# Altium PCB PCB_Olymp_ReflowOven_CANNode_STM32.PcbDoc
Units mm, origin at the board's own origin, x right, y up, seen from the top; angles counter-clockwise.
Board outline 59.94 x 59.94 mm, 2 copper layers (Top Layer, Bottom Layer); 38 components, 51 nets, 172 pads, 6 vias.
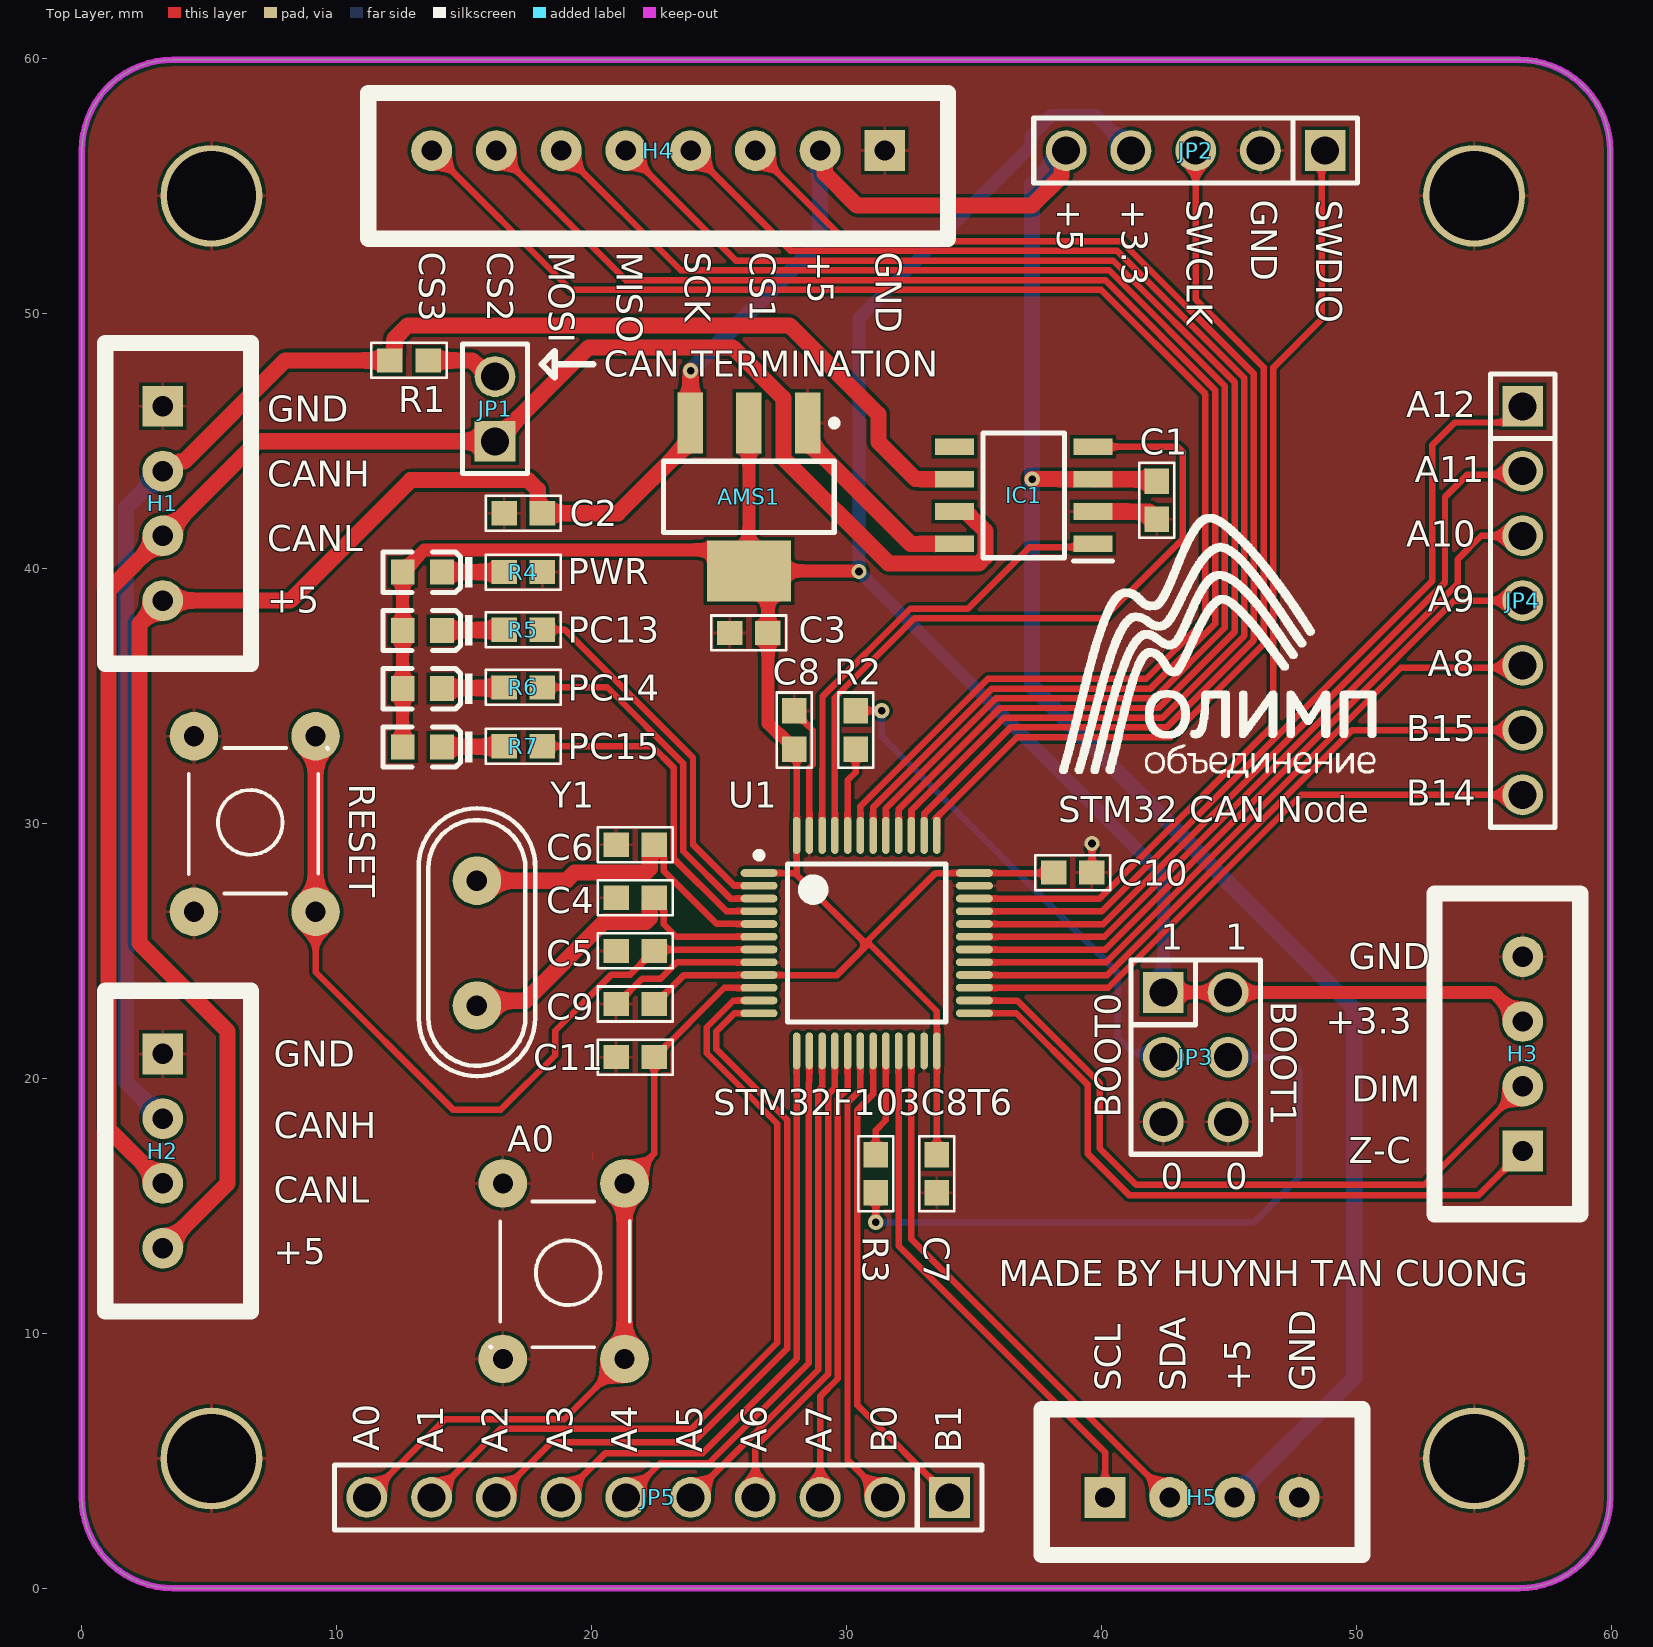
[diagram p0: Top Layer view]
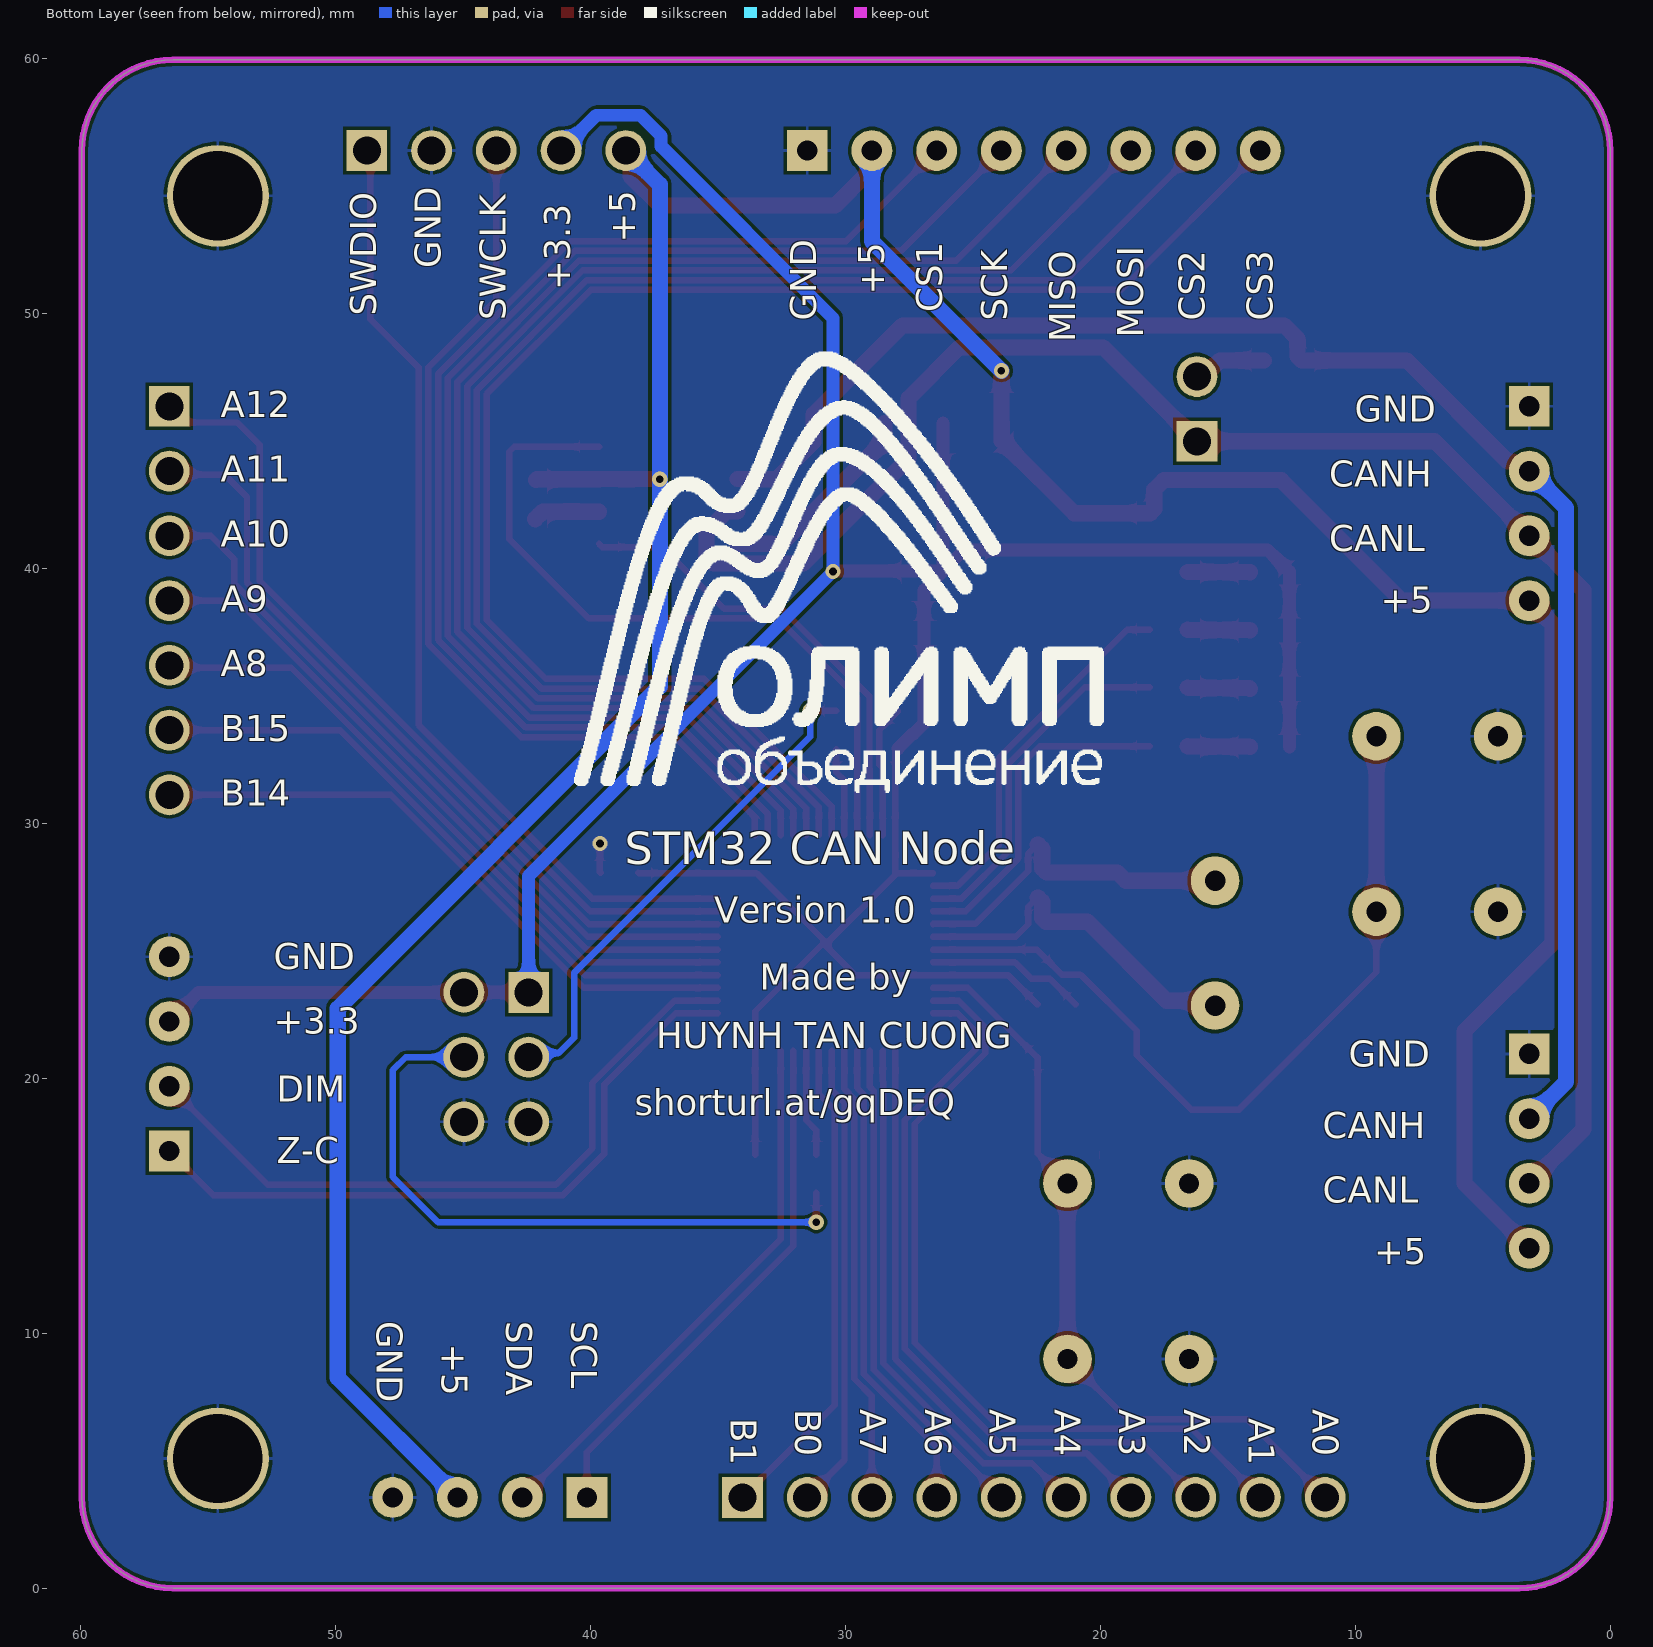
[diagram p1: Bottom Layer view, seen from below]
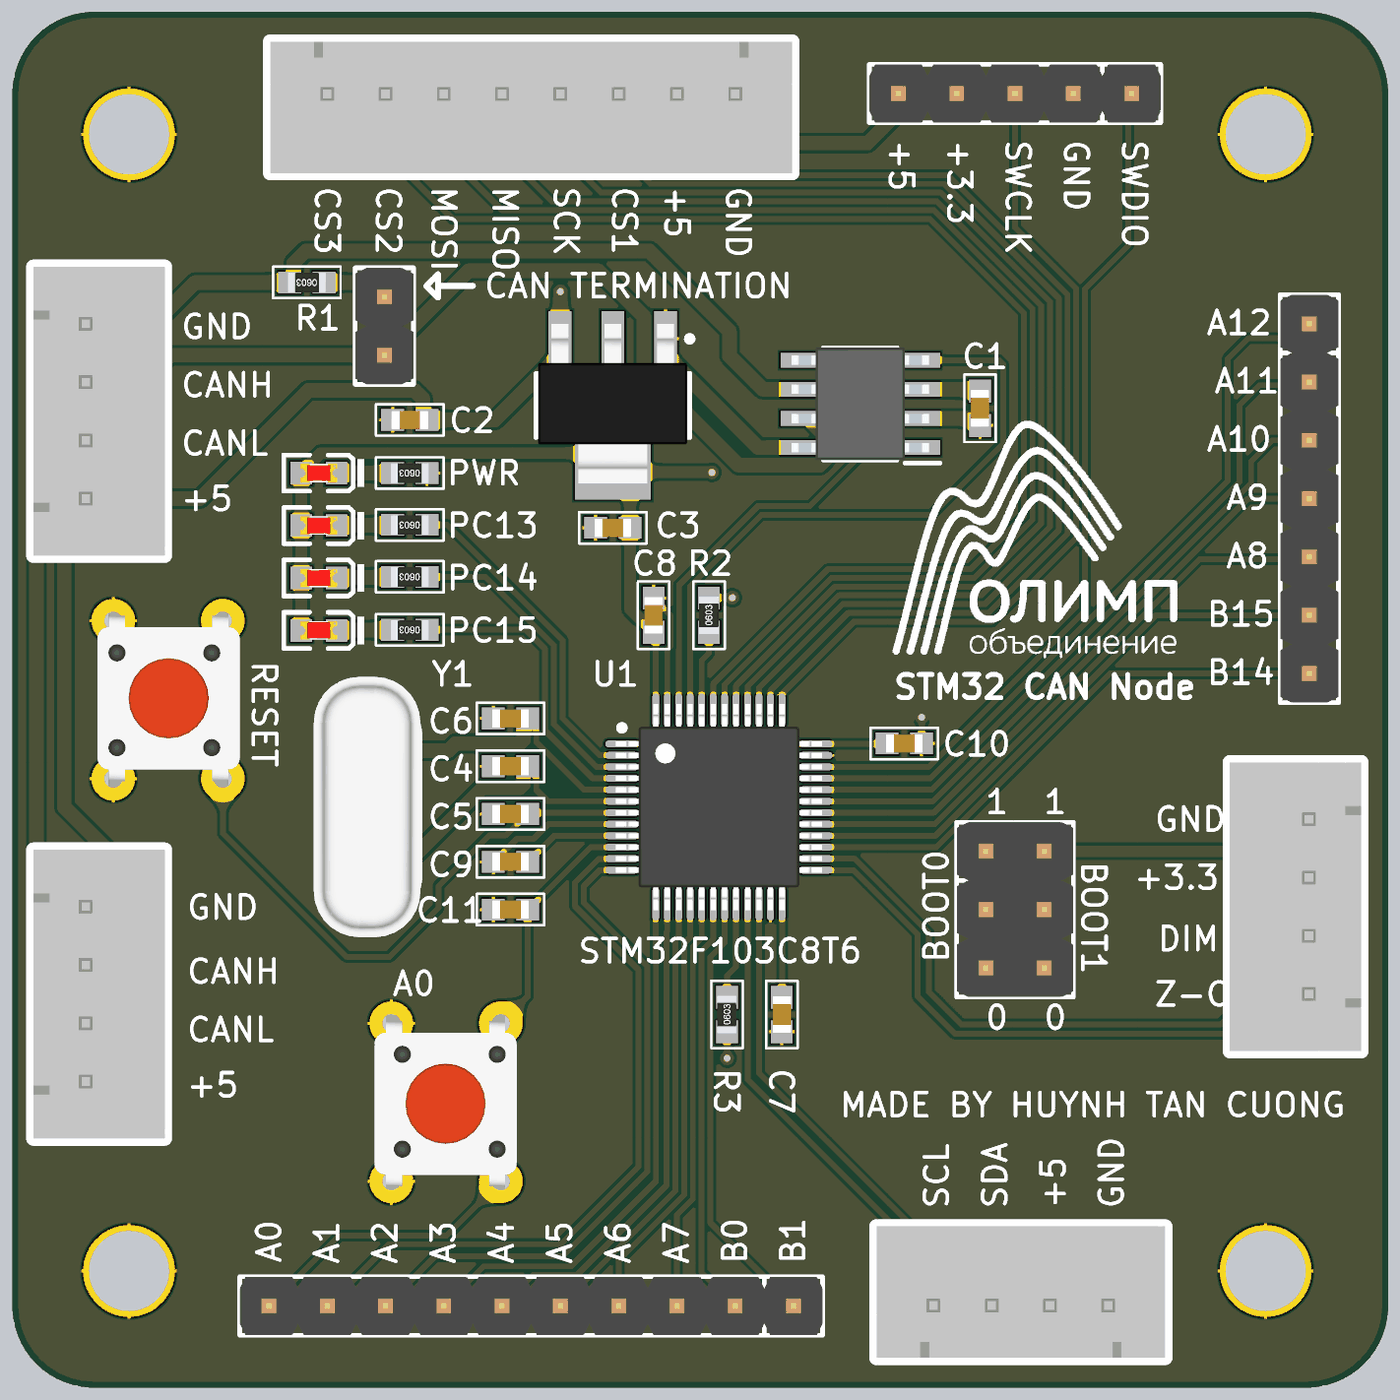
[diagram p2: 3D render of the assembled board from above, using the file's embedded part models]

## Layer stack, top to bottom
Top Solder: solder mask 0.0102, Solder Resist, Dk 3.5
Top Layer: signal copper 0.0356
Dielectric 1: dielectric 0.32, FR-4, Dk 4.8
Bottom Layer: signal copper 0.0356
Bottom Solder: solder mask 0.0102, Solder Resist, Dk 3.5

## Board outline
3.556,0 cw(c3.556,3.556) 0,3.556 0,56.388 cw(c3.556,56.388) 3.556,59.944 56.388,59.944 cw(c56.388,56.388) 59.944,56.388 59.944,3.556 cw(c56.388,3.556) 56.388,0

## Design rules (kind name [scope] priority, off if disabled: settings)
BoardOutlineClearance [All] p1: gap=0.2 ignorepadtopadclearanceinfootprint=FALSE
Clearance [All] p1: gap=0.127 ignorepadtopadclearanceinfootprint=TRUE except(0.2: Arc-THPad Track-THPad; 0.25: Arc-Hole Track-Hole SMDPad-Hole THPad-Hole Via-Hole Fill-Hole Poly-Hole Region-Hole Text-Hole; 0.254: Arc-Via Track-Via Via-Via; 0.5: THPad-THPad)
ComponentClearance [All] p1: gap=0.127 collisioncheckmode=3 verticalgap=0.127 showdistances=TRUE
DiffPairsRouting [All] p1: maxlimit=0.254 minlimit=0.127 mostfreqgap=0.127 toplayer_minwidth=0.127 toplayer_maxwidth=25.4 toplayer_prefwidth=0.127 bottomlayer_minwidth=0.127 bottomlayer_maxwidth=25.4 bottomlayer_prefwidth=0.127 maxuncoupledlength=12.7
Height [All] p1: minheight=0 maxheight=1816.048 prefheight=12.7
HoleSize HoleSize_Via [IsVia] p1: absolutevalues=TRUE maxlimit=99 minlimit=0.2 maxpercent=80.000 minpercent=20.000
HoleSize [All] p2: absolutevalues=TRUE maxlimit=6.3 minlimit=0.2 maxpercent=80.000 minpercent=20.000
HoleSize HoleSize_Pad [IsPad] p3: absolutevalues=TRUE maxlimit=6.35 minlimit=0.7 maxpercent=80.000 minpercent=20.000
HoleToHoleClearance [All] p1: gap=0.25 allowstackedmicrovias=FALSE
MinimumAnnularRing [All] p1: minimumring=0.076
MinimumSolderMaskSliver [All] p1: minsoldermaskwidth=0
PlaneClearance [All] p1: clearance=0.127
PlaneConnect PlaneConnectPowerPads [InPadClass('PowerPads')] p1: planeconnectstyle=Direct reliefexpansion=0.508 reliefentries=4 reliefconductorwidth=0.254 reliefairgap=0.254
PlaneConnect [All] p2: pad.planeconnectstyle=Relief pad.reliefexpansion=0.3 pad.reliefentries=4 pad.reliefconductorwidth=0.127 pad.reliefairgap=0.127 via.planeconnectstyle=Direct via.reliefexpansion=0.3 via.reliefentries=4 via.reliefconductorwidth=0.127 via.reliefairgap=0.127
PolygonConnect PolygonConnectPowerPads [All vs (InPadClass('PowerPads'))] p1: connectstyle=Direct reliefconductorwidth=0.254 reliefentries=4 polygonreliefangle="90 Angle" airgapwidth=0.254
PolygonConnect [All] p2: thpad.connectstyle=Relief thpad.reliefconductorwidth=0.127 thpad.reliefentries=4 thpad.polygonreliefangle="90 Angle" thpad.airgapwidth=0.127 smdpad.connectstyle=Relief smdpad.reliefconductorwidth=0.127 smdpad.reliefentries=4 smdpad.polygonreliefangle="90 Angle" smdpad.airgapwidth=0.127 via.connectstyle=Direct via.reliefconductorwidth=0.127 via.reliefentries=4 via.polygonreliefangle="90 Angle" via.airgapwidth=0.127
RoutingVias [All] p1: holewidth=0.3 width=0.6 viastyle="Through Hole" minholewidth=0.2 minwidth=0.4 maxholewidth=0.6 maxwidth=6.6
SilkToSilkClearance [All] p1: silktosilkclearance=0
SilkToSolderMaskClearance [IsPad] p1: minsilkscreentomaskgap=0.127 clearancetoexposedcopper=TRUE
SolderMaskExpansion [All] p1: expansion=0.075 istentingtop=FALSE
Width Width_2 [InNet('+3.3')] p1: maxlimit=0.508 minlimit=0.152 preferedwidth=0.203
Width [All] p2: maxlimit=25.4 minlimit=0.127 preferedwidth=0.127 minimp=50.000000 maximp=50.000000 favimp=50.000000
Width Width_1 [All] p3: maxlimit=0.635 minlimit=0.152 preferedwidth=0.254
20 further rules are at their usual default settings.

## Classes and differential pairs
component class SCH_POWER_5V_to_3.3V: AMS1 C2 C3
component class STM32F103xx_LQFP48: A0 C4 C5 C6 C7 C8 C9 C10 C11 H3 H4 H5 I2c JP2 JP3 JP4 JP5 ON PC13 PC14 PC15 POW R2 R3 R4 R5 R6 R7 RESET U1 Y1
component class SCH_CAN_Transceiver_TJA1050: C1 H1 H2 IC1 JP1 R1

## Components (designator, comment, footprint, x,y, rotation, side; value= is the part's Value field where it differs from the comment)
A0 "Nut Nhan 4 Chan Cam 6x6" "Nut Nhan 4 Chan Cam 6x6" 21.488,15.545 r270 top (schematic designator PA0)
AMS1 "AMS1117-3.3V" SOT223 26.162,42.799 r180 top value="AMS1117-3.3V SOT223"
C1 "104" "tu 0603" 42.164,42.672 r270 top
C2 "104" "tu 0603" 17.316,42.164 r0 top
C3 "104" "tu 0603" 26.162,37.465 r0 top
C4 "20pF" "tu 0603" 21.705,27.076 r180 top
C5 "104" "tu 0603" 21.705,24.994 r180 top
C6 "20pF" "tu 0603" 21.705,29.159 r180 top
C7 "104" "tu 0603" 33.528,16.256 r270 top
C8 "104" "tu 0603" 27.94,33.655 r90 top
C9 "104" "tu 0603" 21.705,22.911 r180 top
C10 "104" "tu 0603" 38.862,28.067 r0 top
C11 "104" "tu 0603" 21.705,20.828 r180 top
H1 "Header 4P 2.54 Duc Thang" XH2.54M-4 3.175,46.355 r270 top
H2 "Header 4P 2.54 Duc Thang" XH2.54M-4 3.175,20.955 r270 top
H3 "TRIAC" XH2.54M-4 56.515,17.145 r90 top
H4 "Header 8P 2.54 Duc Thang" XH2.54M-8 31.496,56.388 r180 top
H5 "Header 4P 2.54 Duc Thang" XH2.54M-4 40.132,3.556 r0 top
IC1 "TJA1050T" SOIC127P600X175-8N 36.945,42.864 r180 top
JP1 "JP 1x2 2.54" "JP 1x2 DT" 16.205,44.983 r90 top
JP2 "JP 1x5 2.54" "JP 1x5 DT" 48.768,56.388 r180 top
JP3 "JP 2x3 2.54" "JP 2x3 DT" 43.688,20.828 r270 top
JP4 "JP 1x7 2.54" "JP 1x7 DT" 56.515,46.355 r270 top
JP5 "JP 1x10 2.54" "JP 1x10 DT" 34.036,3.556 r180 top
PC13 "0603 Green" 0603_LED_S1 13.354,37.564 r180 top
PC14 "0603 Green" 0603_LED_S1 13.354,35.278 r180 top
PC15 "0603 Green" 0603_LED_S1 13.354,32.992 r180 top
PWR "0603 Red" 0603_LED_S1 13.354,39.85 r180 top
R1 "120R" "tro smd 0603" 12.831,48.157 r180 top
R2 "100k" "tro smd 0603" 30.353,33.655 r90 top
R3 "100k" "tro smd 0603" 31.14,16.256 r90 top
R4 "510R" "tro smd 0603" 17.316,39.853 r180 top
R5 "510R" "tro smd 0603" 17.316,37.592 r180 top
R6 "510R" "tro smd 0603" 17.316,35.331 r180 top
R7 "510R" "tro smd 0603" 17.316,33.02 r180 top
RESET "Nut Nhan 4 Chan Cam 6x6" "Nut Nhan 4 Chan Cam 6x6" 4.191,26.86 r90 top
U1 "STM32F103C8T6" STM32_LQPF48 30.785,25.298 r0 top
Y1 "8Mhz" "Thach Anh 2 chan cam" 15.494,25.298 r270 top value=4Mhz

## Footprints (in the part's own frame and the unit in brackets; to place one, negate y for a bottom-side part, rotate by r counter-clockwise, add the part's x,y. Pads: shape width x height; smd on the part's side, far side on the other; paste and mask are expansions set on the pad)
0603_LED_S1 [mm]
  rect 0.93x0.98 smd: A(0.77,0) K(-0.77,0)
  silkscreen extent -1.97,-0.79 1.54,0.79, body extent -0.8,-0.4 0.8,0.4, height 0.6
"JP 1x2 DT" [mm] "2 pins, 1 row, straight, gold plating"
  rect 1.6x1.6 hole 1.1: 1(0,0)
  round 1.6 hole 1.1: 2(2.54,0)
  silkscreen extent -1.27,-1.27 3.81,1.27, body extent -1.27,-1.27 3.81,1.27, height 8.54
"JP 1x5 DT" [mm] "5 pins, 1 row, straight, gold plating"
  rect 1.6x1.6 hole 1.1: 1(0,0)
  round 1.6 hole 1.1: 2(2.54,0) 3(5.08,0) 4(7.62,0) 5(10.16,0)
  silkscreen extent -1.27,-1.27 11.43,1.27, body extent -1.27,-1.27 11.43,1.27, height 8.54
"JP 1x7 DT" [mm] "7 pins, 1 row, straight, gold plating"
  rect 1.6x1.6 hole 1.1: 1(0,0)
  round 1.6 hole 1.1: 2(2.54,0) 3(5.08,0) 4(7.62,0) 5(10.16,0) 6(12.7,0) 7(15.24,0)
  silkscreen extent -1.27,-1.27 16.51,1.27, body extent -1.27,-1.27 16.51,1.27, height 8.54
"JP 1x10 DT" [mm] "10 pins, 1 row, straight, gold plating"
  rect 1.6x1.6 hole 1.1: 1(0,0)
  round 1.6 hole 1.1: 2(2.54,0) 3(5.08,0) 4(7.62,0) 5(10.16,0) 6(12.7,0) 7(15.24,0) 8(17.78,0) 9(20.32,0) 10(22.86,0)
  silkscreen extent -1.27,-1.27 24.13,1.27, body extent -1.27,-1.27 24.13,1.27, height 8.54
"JP 2x3 DT" [mm]
  rect 1.6x1.6 hole 1.1: 1(-2.54,-1.27)
  round 1.6 hole 1.1: 2(0,-1.27) 3(2.54,-1.27) 4(2.54,1.27) 5(0,1.27) 6(-2.54,1.27)
  silkscreen extent -3.81,-2.54 3.81,2.54, body extent -3.81,-2.54 3.81,2.54, height 8.55
"Nut Nhan 4 Chan Cam 6x6" [mil] "SW button 4pin, 250 x250 mil"
  round 75 hole 31: 1(-13,-8) 1(258,-8) 2(-13,-196) 2(258,-196)
  silkscreen extent 15,-215 240,0, body extent -31,-225 281,19, height 276
SOIC127P600X175-8N [mm]
  rect 1.525x0.65 smd: 1(-2.712,1.905) 2(-2.712,0.635) 3(-2.712,-0.635) 4(-2.712,-1.905) 5(2.712,-1.905) 6(2.712,-0.635) 7(2.712,0.635) 8(2.712,1.905)
  silkscreen extent -3.47,-2.45 1.6,2.58, body extent -3,-2.45 3,2.45, height 1.75
SOT223 [mm]
  rect 1x2.4 smd: 1(-2.3,-2.9) 2(0,-2.9) 3(2.3,-2.9)
  rect 3.3x2.4 smd: 4(0,2.9)
  silkscreen extent -3.47,-3.02 3.35,1.4, body extent -3.25,-3.56 3.25,3.4, height 1.68
STM32_LQPF48 [mm]
  oval 1.45x0.3 smd: 1_1(-4.225,2.75) 2_1(-4.225,2.25) 3_1(-4.225,1.75) 4_1(-4.225,1.25) 5(-4.225,0.75) 6(-4.225,0.25) 7(-4.225,-0.25) 8(-4.225,-0.75) 9(-4.225,-1.25) 10(-4.225,-1.75) 11(-4.225,-2.25) 12(-4.225,-2.75) 25(4.225,-2.75) 26(4.225,-2.25) 27(4.225,-1.75) 28(4.225,-1.25) 29(4.225,-0.75) 30(4.225,-0.25) 31(4.225,0.25) 32(4.225,0.75) 33(4.225,1.25) 34(4.225,1.75) 35(4.225,2.25) 36(4.225,2.75)
  oval 0.3x1.45 smd: 13(-2.75,-4.225) 14(-2.25,-4.225) 15(-1.75,-4.225) 16(-1.25,-4.225) 17(-0.75,-4.225) 18(-0.25,-4.225) 19(0.25,-4.225) 20(0.75,-4.225) 21(1.25,-4.225) 22(1.75,-4.225) 23(2.25,-4.225) 24(2.75,-4.225) 37(2.75,4.225) 38(2.25,4.225) 39(1.75,4.225) 40(1.25,4.225) 41(0.75,4.225) 42(0.25,4.225) 43(-0.25,4.225) 44(-0.75,4.225) 45(-1.25,4.225) 46(-1.75,4.225) 47(-2.25,4.225) 48(-2.75,4.225)
  silkscreen extent -4.35,-3.1 3.1,3.57, body extent -4.5,-4.5 4.5,4.5, height 1.6
"Thach Anh 2 chan cam" [mm]
  round 1.905 hole 0.8: 1(-2.45,0) 2(2.45,0)
  silkscreen extent -5.28,-2.29 5.21,2.29, body extent -5.67,-2.36 5.67,2.29, height 3.5
"tro smd 0603" [mm] "Chip Capacitor, 2-Leads, Body 1,60x0,80mm, IPC Medium Density"
  rect 1x0.95 smd mask+0.076: 1(-0.75,0) 2(0.75,0)
  silkscreen extent -1.47,-0.69 1.47,0.69, body extent -0.82,-0.42 0.82,0.43, height 0.44
"tu 0603" [mm] "Chip Capacitor, 2-Leads, Body 1,60x0,80mm, IPC Medium Density"
  rect 1x0.95 smd mask+0.076: 1(-0.75,0) 2(0.75,0)
  silkscreen extent -1.47,-0.69 1.47,0.69, body extent -0.8,-0.4 0.8,0.4, height 0.9
XH2.54M-4 [mm]
  rect 1.6x1.6 hole 0.8: 1(0,0)
  round 1.6 hole 0.8: 2(2.54,0) 3(5.08,0) 4(7.62,0)
  silkscreen extent -2.48,-2.26 10.1,3.46, body extent -2.48,-2.26 10.1,3.48, height 6.91
XH2.54M-8 [mm]
  rect 1.6x1.6 hole 0.8: 1(0,0)
  round 1.6 hole 0.8: 2(2.54,0) 3(5.08,0) 4(7.62,0) 5(10.16,0) 6(12.7,0) 7(15.24,0) 8(17.78,0)
  silkscreen extent -2.48,-2.26 20.26,3.46, body extent -2.48,-2.26 20.26,3.48, height 6.91

## Part data
A0 RESET: "Nut Nhan 4 Chan 6x6mm", Ma_Hang=MH004584, Ten="Nút Nhấn 4 Chân 6x6x5MM DIP"
AMS1: library part "AMS1117 SMD", "Dán", Chung_Loai=Dán, Don_Vi=Con, Ma_Hang=MH000596
C1 C5 C7 C8 C9 C10 C11: library part "Tu 0603 104 50V 10%", "Dán", Chung_Loai=Dán, Don_Vi=Con, Ma_Hang=MH004568, So_Chan=2, Ten_Linh_Kien="Tụ 0603 104-100nF 10% 50V"
C2 C3: library part "Tu 0603 106 16V 20%", "Dán", Chung_Loai=Dán, Don_Vi=Con, Ma_Hang=MH004848, So_Chan=2, Ten_Linh_Kien="Tụ 0603-10uF 20% 16V"
C4 C6: library part "Tu 0603 22pF 50V 10%", "Dán", Chung_Loai=Dán, Don_Vi=Con, Ma_Hang=MH004570, So_Chan=2, Ten_Linh_Kien="Tụ 0603 22pF 50V 10%"
H1 H2 H4 H5: "Cắm", Chung_Loai=Cắm, Don_Vi=Con
  H1 H2 H5: Ma_Hang=MH001285, Ten_Linh_Kien="Header 4P XH2.54-4P Đực Thẳng"
  H4: Ma_Hang=MH003366, Ten_Linh_Kien="Header 8P XH2.54-8P Đực Thẳng"
H3: library part "Header 4P 2.54 Duc Thang", "Cắm", Chung_Loai=Cắm, Don_Vi=Con, Ma_Hang=MH001285, Ten_Linh_Kien="Header 4P XH2.54-4P Đực Thẳng"
IC1: "Integrated Circuit", Manufacturer_Name=NXP, Mouser Part Number=N/A, Datasheet Link=https://datasheet.datasheetarchive.com/originals/distributors/Datasheets-NXP/DSANXP010005907.pdf, Height=1.75mm, Manufacturer_Part_Number=TJA1050T, Mouser Price/Stock=https://www.mouser.co.uk/ProductDetail/NXP-Semiconductors/TJA1050T?qs=WhRErS6oET%252B5mtiFrt9ZMQ%3D%3D
JP1: library part "JP 1x2 2.54 Duc Thang", "Cắm", Chung_Loai=Cắm, Don_Vi=Con, Ma_Hang=MH000903, Ten_Linh_Kien="Jump Đơn Đực 2.54MM 1x40P Thẳng 11MM"
JP2: library part "JP 1x5 2.54 Duc Cong", "Cắm", Chung_Loai=Cắm, Don_Vi=Con, Ma_Hang=MH000903, Ten_Linh_Kien="Jump Đơn Đực 2.54MM 1x40P Thẳng 11MM"
JP3: library part "JP 2x3 2.54 Duc Thang", "Cắm", Chung_Loai=Cắm, Don_Vi=Con, Ma_Hang=MH002686, Ten_Linh_Kien="Jump Đôi Đực 2.54MM 2x40P Thẳng 11MM"
JP4: library part "JP 1x7 2.54 Duc Thang", "Cắm", Chung_Loai=Cắm, Don_Vi=Con, Ma_Hang=MH000903, Ten_Linh_Kien="Jump Đơn Đực 2.54MM 1x40P Thẳng 11MM"
JP5: library part "JP 1x10 2.54 Duc Thang", "Cắm", Chung_Loai=Cắm, Don_Vi=Con, Ma_Hang=MH000903, Ten_Linh_Kien="Jump Đơn Đực 2.54MM 1x40P Thẳng 11MM"
PC13 PC14 PC15: library part "0603 LED Green", "LED", Color=Green, Package=0603, SuppliersPartNumber=C72043, ComponentLink1Description=供应商链接, ComponentLink1URL=http://www.szlcsc.com/product/details_73152.html, Supplier=LC
PWR: library part "0603 LED Red", "LED", Color=Red, Package=0603, SuppliersPartNumber=C2286, ComponentLink1Description=供应商链接, ComponentLink1URL=http://www.szlcsc.com/product/details_2659.html, Supplier=LC
R1: library part "Tro 0603 1% 0R", "Dán", Chung_Loai=Dán, Don_Vi=Con, Ma_Hang=MH005792, So_Chan=2, Ten_Linh_Kien="Trở 0603 1% 0R"
R2 R3 R4 R5 R6 R7: library part "Tro 0603 1% 10k", "Dán", Chung_Loai=Dán, Don_Vi=Con, Ma_Hang=MH006333, So_Chan=2, Ten_Linh_Kien="Trở 0603 1% 10k"
U1: library part STM32F103xx_LQFP48, ComponentLink1Description="Manufacturer Link", ComponentLink1URL=www.st.com/stm32, ComponentLink2Description=Datasheet, ComponentLink2URL=http://www.st.com/stonline/products/literature/ds/13587.pdf, DatasheetVersion="rev6, Mar-2008", PackageDescription="48-Pin Low-Profile Quad Flat Pack, 7 x 7 mm Body, 0.5 mm Pitch (LQFP48)", PackageReference=LQFP48, PackageVersion=Mar-2008, Published=30-May-2008, Publisher="Altium Limited"
Y1: library part "Thach Anh 2 chan Cam", "Crystal For all Crystal 2pin."

## Free pads (board coordinates)
  round 4 hole 3.5: 1(5.08,5.08) 2(5.08,54.61) 3(54.61,5.08) 4(54.61,54.61)

## Via types
v1: diameter 0.6, hole 0.3, Top Layer to Bottom Layer, tented both sides, 6 vias

## Nets (pads, with @x,y where several pads share a name; then routed paths per layer and width w, separated by ;. In a path a pad name is that pad's centre, name@x,y a point inside that pad or via, vN(x,y) a via of type N, cw(c..) or ccw(c..) an arc to the next point about the centre after c; other vN are vias at no path point)
+3.3: AMS1.2 AMS1.4 C3.2 C7.1 C8.1 C9.1 C10.1 H3.3 JP2.4 JP3.1 JP3.6 PC13.A PC14.A PC15.A PWR.A U1.1_1 U1.9 U1.24 U1.36 U1.48 | length 137.4
  Top Layer w0.254: C9.1 22.48,22.911 23.618,24.048 U1.9 29.62,24.048 30.797,25.225 ; U1.1_1 27.973,28.048 28.035,27.987 ; C8.1 28.035,32.81 U1.48 28.035,27.987 ; C7.1 33.535,17.013 U1.24 33.535,22.623 30.865,25.293 ; C10.1 38.093,28.048 U1.36 33.484,28.048 30.865,25.429 30.865,25.293 ; 28.035,27.987 30.797,25.225 ; 30.797,25.225 30.865,25.293
  Top Layer w0.508: PC15.A PC14.A PWR.A@12.584,39.875 ; PWR.A PWR.A@12.584,39.875 ; AMS1.2 AMS1.4 ; C8.1 27.94,32.93 27.36,33.51 27.321,33.51 26.912,33.919 C3.2 26.912,39.149 AMS1.4 ; v1(30.48,39.878) 30.459,39.899 AMS1.4 ; JP3.1 JP3.6 55.372,23.368 H3.3 ; PWR.A@12.584,39.875 13.43,40.721 25.34,40.721 AMS1.4
  Bottom Layer w0.508: JP2.4 39.764,57.772 38.035,57.772 37.224,56.961 37.224,56.553 30.48,49.809 v1(30.48,39.878) 42.418,27.94 JP3.1
+5: AMS1.3 C1.1 C2.2 H1.4 H2.4 H4.2 H5.3 IC1.3 JP2.5 | length 144.3
  Top Layer w0.635: H2.4 5.715,15.875 5.715,21.844 2.261,25.298 2.261,37.821 H1.4 8.169,38.735 12.894,43.459 17.512,43.459 17.884,43.087 17.884,42.322 18.041,42.164 21.027,42.164 23.68,44.816 23.771,44.908 23.862,44.999 AMS1.3 23.876,45.713 v1(23.876,47.752) ; H4.2 29.141,56.203 29.141,55.492 30.404,54.229 37.262,54.229 38.423,55.391 38.423,56.203 JP2.5 ; v1(37.273,43.499) IC1.3 39.664,43.491 42.095,43.491 C1.1@42.126,43.46
  Bottom Layer w0.635: v1(23.876,47.752) 28.956,52.832 H4.2 ; JP2.5 37.273,55.053 37.273,35.371 49.911,22.733 49.911,8.255 H5.3
BOOT0: R2.1 U1.44 | length 3.5
  Top Layer w0.254: U1.44 30.035,31.686 30.353,32.004 R2.1
BOOT1: R3.2 U1.20 | length 4.2
  Top Layer w0.254: R3.2 31.14,17.954 31.535,18.348 U1.20
CS1: H4.3 U1.38 | length 50.2
  Top Layer w0.254: H4.3 29.972,52.832 40.767,52.832 45.974,47.625 45.974,37.191 42.543,33.76 36.427,33.76 33.035,30.368 U1.38
CS2: H4.7 U1.42 | length 58.8
  Top Layer w0.254: H4.7 21.336,51.308 40.136,51.308 44.45,46.994 44.45,37.822 41.912,35.284 35.696,35.284 31.035,30.623 U1.42
CS3: H4.8 U1.43 | length 60.9
  Top Layer w0.254: H4.8 19.177,50.927 39.978,50.927 44.069,46.836 44.069,37.98 41.754,35.665 35.538,35.665 30.535,30.662 U1.43
DIM: H3.2 U1.26 | length 27.6
  Top Layer w0.254: U1.26 36.692,23.048 39.929,19.812 39.929,17.247 41.351,15.824 52.654,15.824 H3.2
GND: A0.2 AMS1.1 C1.2 C2.1 C3.1 C4.2 C5.2 C6.2 C7.2 C8.2 C9.2 C10.2 C11.2 H1.1 H2.1 H3.4 H4.1 H5.4 IC1.2 IC1.8 JP2.2 JP3.3 JP3.4 pad.1 pad.2 pad.3 pad.4 R4.1 RESET.1 U1.8 U1.23 U1.35 U1.47 | length 24.2
  Top Layer w0.254: C9.2 20.98,22.911 21.973,23.904 22.699,23.904 23.344,24.548 U1.8 ; C8.2 27.94,34.38 28.669,33.651 28.669,32.3 28.535,32.166 U1.47 ; C10.2@39.587,28.067 C10.2 ; C10.2@39.624,28.079 v1(39.624,29.21)
  Top Layer w0.635: AMS1.1 28.462,44.999 32.502,40.959 IC1.8 ; IC1.2@40.405,42.221 39.664,42.221 IC1.2 41.857,42.229 41.981,42.104 42.006,42.104 42.164,41.947 C1.2
MISO: H4.5 U1.40 | length 54.5
  Top Layer w0.254: H4.5 25.654,52.07 40.451,52.07 45.212,47.309 45.212,37.507 42.228,34.522 36.015,34.522 32.035,30.542 U1.40
MOSI: H4.6 U1.41 | length 56.6
  Top Layer w0.254: H4.6 23.495,51.689 40.294,51.689 44.831,47.152 44.831,37.664 42.07,34.903 35.854,34.903 31.535,30.584 U1.41
NetH1_2: H1.2 H2.2 IC1.6 R1.2 | length 63.6
  Top Layer w0.635: H1.2 3.436,43.815 3.812,44.191 4.008,44.191 7.974,48.157 12.106,48.157 12.264,48.314 12.264,49.01 12.784,49.53 27.756,49.53 31.242,46.044 31.242,44.958 32.701,43.499 IC1.6
  Bottom Layer w0.635: H2.2 1.727,19.862 1.727,42.367 H1.2
NetH1_3: H1.3 H2.3 IC1.7 JP1.1 | length 70
  Top Layer w0.635: H2.3 1.045,18.004 1.045,39.145 H1.3 6.883,44.983 JP1.1 19.888,48.666 25.523,48.666 27.518,46.672 27.518,44.315 31.643,40.189 35.18,40.189 35.44,40.45 35.44,41.468 35.136,41.772 35.127,41.772 34.67,42.229 IC1.7
NetIC1_1: IC1.1 U1.46 | length 18.5
  Top Layer w0.254: U1.46 29.035,32.127 29.05,32.142 29.05,34.975 32.49,38.416 34.754,38.416 37.169,40.831 39.528,40.831 IC1.1
NetIC1_4: IC1.4 U1.45 | length 28.7
  Top Layer w0.254: U1.45 29.535,34.921 32.648,38.035 40.067,38.035 43.18,41.148 43.18,44.577 42.988,44.769 IC1.4
NetJP1_2: JP1.2 R1.1 | length 2.9
  Top Layer w0.635: R1.1 15.311,48.157 15.944,47.523 JP1.2
NetJP3_2: JP3.2 R2.2 | length 19.8
  Top Layer w0.254: R2.2 30.365,34.417 v1(31.369,34.417)
  Bottom Layer w0.254: v1(31.369,34.417) 31.369,33.401 40.64,24.13 40.64,21.59 41.237,20.993 42.253,20.993 JP3.2
NetJP3_5: JP3.5 R3.1 | length 25.9
  Top Layer w0.254: v1(31.14,14.351) R3.1
  Bottom Layer w0.254: v1@30.988,14.351 45.974,14.351 47.752,16.129 47.752,20.32 47.244,20.828 JP3.5
NetJP4_1: JP4.1 U1.33 | length 32.8
  Top Layer w0.254: U1.33 40.01,26.548 52.959,39.497 52.959,44.831 53.848,45.72 55.88,45.72 JP4.1
NetJP4_2: JP4.2 U1.32 | length 30.8
  Top Layer w0.254: U1.32 40.068,26.048 53.467,39.448 53.467,42.799 54.346,43.678 56.378,43.678 JP4.2
NetJP4_3: JP4.3 U1.31 | length 28.6
  Top Layer w0.254: U1.31 40.106,25.548 53.976,39.418 53.976,40.365 54.886,41.275 JP4.3
NetJP4_4: JP4.4 U1.30 | length 27.2
  Top Layer w0.254: U1.30 40.145,25.048 53.832,38.735 JP4.4
NetJP4_5: JP4.5 U1.29 | length 26.3
  Top Layer w0.254: U1.29 40.184,24.548 51.736,36.101 56.421,36.101 JP4.5
NetJP4_6: JP4.6 U1.28 | length 25.5
  Top Layer w0.254: U1.28 40.223,24.048 49.829,33.655 JP4.6
NetJP4_7: JP4.7 U1.27 | length 24.6
  Top Layer w0.254: U1.27 40.262,23.548 47.828,31.115 JP4.7
NetJP5_1: JP5.1 U1.19 | length 19.3
  Top Layer w0.254: U1.19 31.035,19.376 30.411,18.753 30.411,7.181 JP5.1
NetJP5_2: JP5.2 U1.18 | length 18.3
  Top Layer w0.254: U1.18 30.535,19.542 30.03,19.038 30.03,5.022 JP5.2
NetJP5_3: JP5.3 U1.17 | length 18
  Top Layer w0.254: JP5.3 28.956,7.518 29.649,8.212 29.649,19.195 30.035,19.581 U1.17
NetJP5_4: JP5.4 U1.16 | length 18.8
  Top Layer w0.254: JP5.4 26.416,5.537 29.268,8.39 29.268,19.353 29.535,19.62 U1.16
NetJP5_5: JP5.5 U1.15 | length 19.7
  Top Layer w0.254: JP5.5 28.887,8.567 28.887,19.511 29.035,19.658 U1.15
NetJP5_6: JP5.6 U1.14 | length 21.6
  Top Layer w0.254: JP5.6 22.682,4.902 24.587,4.902 28.506,8.821 28.506,19.849 28.535,19.878 U1.14
NetJP5_7: JP5.7 U1.13 | length 23.6
  Top Layer w0.254: JP5.7 20.523,5.283 24.333,5.283 28.042,8.992 28.042,18.527 28.035,18.534 U1.13
NetJP5_8: JP5.8 U1.12 | length 29.4
  Top Layer w0.254: JP5.8 18.415,5.715 23.981,5.715 27.661,9.394 27.661,18.37 24.892,21.138 24.892,21.844 25.596,22.548 U1.12
NetJP5_9: JP5.9 U1.11 | length 32.1
  Top Layer w0.254: JP5.9 16.406,6.246 23.899,6.246 27.28,9.627 27.28,18.212 24.511,20.98 24.511,22.002 25.549,23.04 26.551,23.04 U1.11
NetON_K: PWR.K R4.2 | length 2.4
  Top Layer w0.635: PWR.K 14.125,39.851 R4.2 R4.2
NetPC13_K: PC13.K R5.2 | length 2.5
  Top Layer w0.635: PC13.K 14.138,37.578 16.552,37.578 R5.2
NetPC14_K: PC14.K R6.2 | length 2.5
  Top Layer w0.635: PC14.K 14.151,35.305 16.54,35.305 R6.2
NetPC15_K: PC15.K R7.2 | length 2.5
  Top Layer w0.635: PC15.K 14.138,33.006 16.552,33.006 R7.2
OSC_IN: C6.1 U1.5 Y1.1 | length 13.8
  Top Layer w0.254: C6.1 22.48,29.159 22.828,28.811 22.828,28.124 24.895,26.057 26.551,26.057 U1.5
  Top Layer w0.635: Y1.1 18.999,27.748 19.318,28.067 22.107,28.067 22.272,28.232 22.272,29.002 22.43,29.159 C6.1
OSC_OUT: C4.1 U1.6 Y1.2 | length 14.2
  Top Layer w0.254: C4.1 22.48,27.076 22.828,26.728 22.828,26.042 23.317,25.552 26.556,25.552 U1.6
  Top Layer w0.635: Y1.2 15.687,23.041 17.399,23.041 20.494,26.137 22.125,26.137 22.273,26.284 22.273,26.919 22.43,27.076 C4.1
PA0: A0.1 C11.1 JP5.10 U1.10 | length 29.9
  Top Layer w0.254: JP5.10 14.247,6.627 18.921,6.627 A0.1@21.285,8.992 ; A0.1@21.285,15.875 22.455,17.045 C11.1 22.48,20.828 25.2,23.548 U1.10
  Top Layer w0.635: A0.1@21.285,8.992 A0.1@21.285,15.875
PC13: R5.1 U1.2_1 | length 14.6
  Top Layer w0.254: R5.1 18.948,37.592 23.971,32.569 23.971,29.166 25.58,27.557 26.551,27.557 U1.2_1
PC14: R6.1 U1.3_1 | length 13.9
  Top Layer w0.254: R6.1 20.605,35.331 23.59,32.346 23.59,28.899 25.441,27.048 U1.3_1
PC15: R7.1 U1.4_1 | length 13.3
  Top Layer w0.254: R7.1 22.377,33.02 23.209,32.188 23.209,28.622 25.274,26.557 26.551,26.557 U1.4_1
RESET: C5.1 RESET.2 U1.7 | length 32
  Top Layer w0.254: RESET.2@9.169,26.53 9.169,24.155 14.554,18.771 16.434,18.771 18.567,20.904 18.567,21.857 20.778,24.068 21.505,24.068 22.485,25.048 U1.7
  Top Layer w0.635: RESET.2@9.169,26.53 RESET.2@9.169,33.414
SCK: H4.4 U1.39 | length 52.4
  Top Layer w0.254: H4.4 27.813,52.451 40.609,52.451 45.593,47.467 45.593,37.349 42.385,34.141 36.173,34.141 32.535,30.503 U1.39
SCL: H5.1 U1.21 | length 20.9
  Top Layer w0.254: U1.21 32.035,13.431 40.132,5.334 H5.1
SDA: H5.2 U1.22 | length 21.7
  Top Layer w0.254: U1.22 32.535,13.693 H5.2
SWCLK: JP2.3 U1.37 | length 36.8
  Top Layer w0.254: U1.37 33.544,29.532 33.544,30.242 36.681,33.379 42.701,33.379 46.355,37.033 46.355,47.879 43.688,50.546 JP2.3
SWDIO: JP2.1 U1.34 | length 37.9
  Top Layer w0.254: U1.34 39.928,27.048 46.736,33.857 46.736,47.879 48.625,49.768 48.625,56.245 JP2.1
Zero-cross: H3.1 U1.25 | length 26.8
  Top Layer w0.254: U1.25 36.654,22.548 39.446,19.756 39.446,17.043 41.072,15.418 54.788,15.418 H3.1
pads on no net: IC1.5

## Polygon pours and split planes (outlines as drawn)
GND on Top Layer "GND_L01_P000" (solid, pour order 0): 0,59.944 59.944,59.944 59.944,-0.254 0,-0.254
GND on Bottom Layer "GND_L02_P001" (solid, pour order 1): 0,59.944 59.944,59.944 60.198,59.69 60.198,-0.254 0,-0.254 -0.254,-0.508

## Keep-outs
Keep-Out Layer:
  the board outline again, w0.254

## Silkscreen, mask and mechanical layers (free items; w line width, h text height)
Top Overlay:
  drawing of 25 lines, arcs and shapes, not listed
  text "+5" at 38.252,54.458 h1.02 r270
  text "+3.3" at 40.792,54.458 h1.02 r270
  text "SWCLK" at 43.332,54.458 h1.02 r270
  text "GND" at 45.872,54.458 h1.02 r270
  text "SWDIO" at 48.412,54.458 h1.02 r270
  text "CS3" at 13.233,52.426 h1.02 r270
  text "CS2" at 15.9,52.426 h1.02 r270
  text "MOSI" at 18.313,52.426 h1.02 r270
  text "MISO" at 20.98,52.426 h1.02 r270
  text "SCK" at 23.647,52.426 h1.02 r270
  text "CS1" at 26.187,52.426 h1.02 r270
  text "+5" at 28.473,52.426 h1.02 r270
  text "GND" at 31.14,52.426 h1.02 r270
  text "CAN TERMINATION" at 20.472,47.523 h1.02
  text "A12" at 51.951,45.923 h1.02
  text "GND" at 7.264,45.745 h1.02
  text "A11" at 52.29,43.383 h1.02
  text "CANH" at 7.264,43.205 h1.02
  text "A10" at 51.951,40.843 h1.02
  text "CANL" at 7.264,40.665 h1.02
  text "A9" at 52.798,38.303 h1.02
  text "+5" at 7.264,38.252 h1.02
  text "A8" at 52.798,35.763 h1.02
  text "B15" at 51.951,33.223 h1.02
  text "B14" at 51.951,30.683 h1.02
  text "STM32 CAN Node" at 38.303,30.048 h1.02
  text "1" at 42.316,25.044 h1.02
  text "1" at 44.856,25.044 h1.02
  text "GND" at 49.682,24.282 h1.02
  text "BOOT1" at 46.634,23.011 h1.02 r270
  text "+3.3" at 48.793,21.742 h1.02
  text "GND" at 7.518,20.447 h1.02
  text "DIM" at 49.809,19.075 h1.02
  text "BOOT0" at 40.742,18.44 h1.02 r90
  text "CANH" at 7.518,17.653 h1.02
  text "Z-C" at 49.682,16.662 h1.02
  text "0" at 42.316,15.646 h1.02
  text "0" at 44.856,15.646 h1.02
  text "CANL" at 7.518,15.113 h1.02
  text "+5" at 7.518,12.7 h1.02
  text "MADE BY HUYNH TAN CUONG" at 35.966,11.836 h1.02
  text "SCL" at 40.754,7.722 h1.02 r90
  text "SDA" at 43.294,7.722 h1.02 r90
  text "+5" at 45.834,7.722 h1.02 r90
  text "GND" at 48.374,7.722 h1.02 r90
  text "A0" at 11.659,5.359 h1.02 r90
  text "A1" at 14.173,5.309 h1.02 r90
  text "A2" at 16.713,5.309 h1.02 r90
  text "A3" at 19.253,5.309 h1.02 r90
  text "A4" at 21.793,5.309 h1.02 r90
  text "A5" at 24.333,5.309 h1.02 r90
  text "A6" at 26.873,5.309 h1.02 r90
  text "A7" at 29.413,5.309 h1.02 r90
  text "B0" at 31.953,5.309 h1.02 r90
  text "B1" at 34.493,5.309 h1.02 r90
Bottom Overlay:
  drawing of 20 lines, arcs and shapes, not listed
  text "+5" at 38.246,52.778 h1.02 r270
  text "GND" at 45.866,51.762 h1.02 r270
  text "+3.3" at 40.786,50.915 h1.02 r270
  text "+5" at 28.473,50.732 h1.02 r270
  text "CS1" at 26.187,50.055 h1.02 r270
  text "SWDIO" at 48.406,49.9 h1.02 r270
  text "SWCLK" at 43.326,49.731 h1.02 r270
  text "CS3" at 13.233,49.716 h1.02 r270
  text "CS2" at 15.9,49.716 h1.02 r270
  text "SCK" at 23.647,49.716 h1.02 r270
  text "GND" at 31.14,49.716 h1.02 r270
  text "MOSI" at 18.313,49.039 h1.02 r270
  text "MISO" at 20.98,48.87 h1.02 r270
  text "A12" at 54.494,45.927 h1.02
  text "GND" at 10.008,45.745 h1.02
  text "A11" at 54.494,43.387 h1.02
  text "CANH" at 11.024,43.205 h1.02
  text "A10" at 54.494,40.847 h1.02
  text "CANL" at 11.024,40.665 h1.02
  text "A9" at 54.494,38.307 h1.02
  text "+5" at 8.992,38.252 h1.02
  text "A8" at 54.494,35.767 h1.02
  text "B15" at 54.494,33.227 h1.02
  text "B14" at 54.494,30.687 h1.02
  text "STM32 CAN Node" at 38.648,28.397 h1.27
  text "Version 1.0" at 35.135,26.103 h1.02
  text "GND" at 52.426,24.282 h1.02
  text "Made by" at 33.358,23.47 h1.02
  text "+3.3" at 52.426,21.742 h1.02
  text "HUYNH TAN CUONG" at 37.42,21.175 h1.02
  text "GND" at 10.262,20.447 h1.02
  text "DIM" at 52.299,19.075 h1.02
  text "shorturl.at/gqDEQ" at 38.25,18.542 h1.02
  text "CANH" at 11.278,17.653 h1.02
  text "Z-C" at 52.299,16.662 h1.02
  text "CANL" at 11.278,15.113 h1.02
  text "+5" at 9.246,12.7 h1.02
  text "SCL" at 40.754,10.465 h1.02 r90
  text "SDA" at 43.294,10.465 h1.02 r90
  text "GND" at 48.374,10.465 h1.02 r90
  text "+5" at 45.834,9.576 h1.02 r90
  text "A0" at 11.659,7.01 h1.02 r90
  text "A2" at 16.713,7.01 h1.02 r90
  text "A3" at 19.253,7.01 h1.02 r90
  text "A4" at 21.793,7.01 h1.02 r90
  text "A5" at 24.333,7.01 h1.02 r90
  text "A6" at 26.873,7.01 h1.02 r90
  text "A7" at 29.413,7.01 h1.02 r90
  text "B0" at 31.953,7.01 h1.02 r90
  text "A1" at 14.173,6.672 h1.02 r90
  text "B1" at 34.493,6.672 h1.02 r90